# Altium PCB PCB.PcbDoc (part 2 of 2)
Units mil, origin at the board's own origin, x right, y up, seen from the top; angles counter-clockwise.
Board outline 2180 x 2315 mil, 4 copper layers (Top Layer, Layer 1, power, Bottom Layer), stack 23.756 mil thick; 49 components, 44 nets, 312 pads, 189 vias.
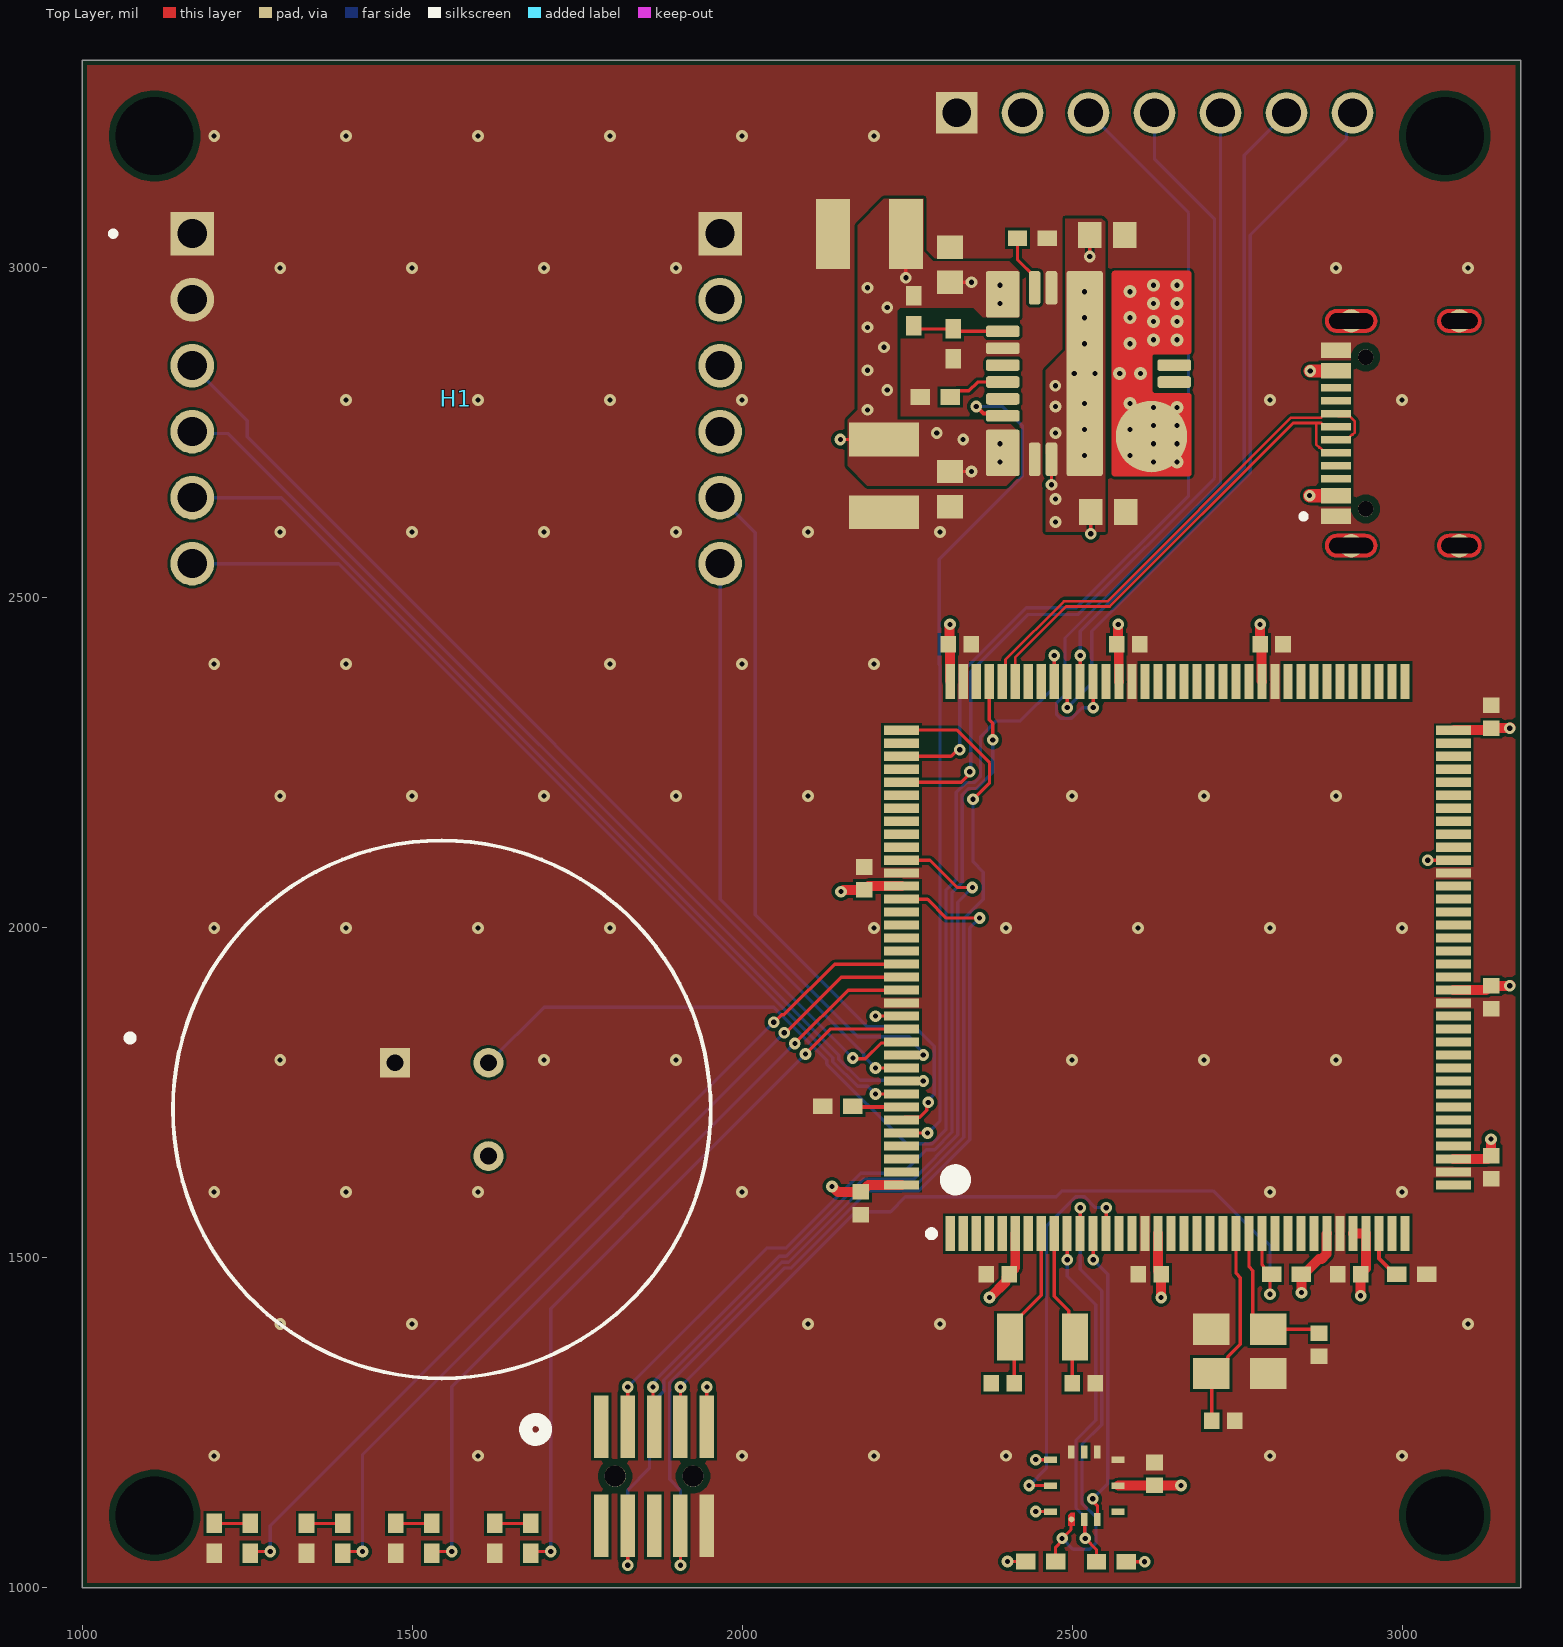
[diagram p0: Top Layer view]

## Via types
v1: diameter 17.72, hole 7.87, Top Layer to Bottom Layer, tented both sides, 153 vias
v2: diameter 19.68, hole 7.87, Top Layer to Bottom Layer, 36 vias

## Nets (pads, with @x,y where several pads share a name; then routed paths per layer and width w, separated by ;. In a path a pad name is that pad's centre, name@x,y a point inside that pad or via, vN(x,y) a via of type N, cw(c..) or ccw(c..) an arc to the next point about the centre after c; other vN are vias at no path point) (continued)
PGOOD: (continued)
  Bottom Layer w5: v1(2281.12,1689.25) 2300,1708.13 2300,2397.71 2298.64,2399.07 2298.64,2558.64 2425,2685 2425,2760 2395,2790 v1(2355,2790)
PIR_INT: MD1.2 U1.100 | length 1680.7
  Top Layer w5: U1.100 v1(2472.99,2412.74)
  Bottom Layer w5: MD1.2 1700,1880 2048.13,1880 2128.54,1799.59 2128.54,1793.73 2249.38,1672.89 2287.9,1672.89 2309,1693.99 2309,2057.13 2324.64,2072.78 2324.64,2205.5 2339.5,2220.36 2351.78,2220.36 2361.36,2229.94 2361.36,2289.49 2385.51,2313.64 2421.78,2313.64 2472.99,2364.86 v1(2472.99,2412.74)
RST: J2.4 R3.2 U1.25 | length 1280.8
  Top Layer w5: J2.4 v1(1906.65,1304.41) ; U1.25 2787.95,1489.41 2790.1,1487.26 2790.1,1484.31 2800,1474.41 v1(2800,1445)
  Bottom Layer w5: v1(1906.65,1304.41) 2172.24,1570 2225,1570 2247.48,1592.48 2476.1,1592.48 2485.1,1601.48 2713.72,1601.48 2789.5,1525.71 2792.43,1525.71 2800,1518.13 v1(2800,1445)
RX: J2.9 U1.122 | length 1423.2
  Top Layer w5: v1(1906.65,1034.2) J2.9 ; U1.122 2281.12,2043.58 2309.71,2015 v1(2360,2015)
  Bottom Layer w5: v1(1906.65,1034.2) 1906.65,1148.28 1890.29,1164.64 1890.29,1311.19 2063.7,1484.59 2074.1,1484.59 2191,1601.48 2267.4,1601.48 2345,1679.08 2345,2000 v1(2360,2015)
SWDCLK: J2.7 U1.109 | length 1720.8
  Top Layer w5: v1(1826.65,1034.2) J2.7 ; U1.109 2242.2,2300 2325,2300 2375,2250 2375,2220 v1(2350,2195)
  Bottom Layer w5: v1(1826.65,1034.2) 1826.65,1148.28 1859.69,1181.32 1859.69,1276.03 1881.29,1297.63 1881.29,1314.91 2059.97,1493.59 2070.37,1493.59 2187.27,1610.48 2263.67,1610.48 2336,1682.81 2336,2014.13 2365.36,2043.49 2365.36,2084.64 2350,2100 v1(2350,2195)
SWDIO: J2.2 U1.105 | length 1429.4
  Top Layer w5: J2.2 v1(1826.65,1304.41) ; U1.105 2374.57,2315.43 2380,2310 v1(2380,2285)
  Bottom Layer w5: v1(1826.65,1304.41) 2037.24,1515 2066.33,1515 2179.81,1628.48 2243.49,1628.48 2278.9,1663.89 2291.63,1663.89 2318,1690.27 2318,2053.41 2333.64,2069.05 2333.64,2201.78 2343.22,2211.36 2355.5,2211.36 2380,2235.85 v1(2380,2285)
TX: J2.3 U1.119 | length 1193.5
  Top Layer w5: v1(1864.93,1304.41) 1864.93,1246.02 J2.3 ; U1.119 2284.78,2102.64 2326.15,2061.27 v1(2349,2061.27)
  Bottom Layer w5: v1(1864.93,1304.41) 1867.37,1306.84 1867.37,1313.72 2056.24,1502.59 2066.65,1502.59 2183.54,1619.48 2259.95,1619.48 2327,1686.54 2327,2039.27 v1(2349,2061.27)
USB_D_N: J1.A7 J1.B7 U1.103 | length 741.6
  Top Layer w4: U1.103@2415,2372.25 U1.103 2413.94,2410.11 2490.83,2487 2557,2487 2835.21,2765.21 2870,2765.21 ; J1.B7 2883.46,2720 2875.68,2727.78 2875.07,2727.78 2870,2732.85 2870,2765.21 ; J1.A7 2883.46,2759.37 2877.62,2765.21 2870,2765.21
USB_D_P: J1.A6 J1.B6 U1.104 | length 773.5
  Top Layer w4: U1.104 2399.14,2378.2 2399.14,2406.63 2487.51,2495 2553.69,2495 2831.9,2773.21 2877.62,2773.21 2883.46,2779.06 J1.B6 2903.91,2775.15 2921.05,2775.15 2928.44,2767.76 2928.44,2750.98 2924.93,2747.46 2924.31,2747.46 2916.54,2739.69 J1.A6
VCC: C2.1 C4.2 C5.2 C6.2 C7.2 C8.2 C9.2 C14.2 C15.2 C16.2 C17.2 C18.2 C19.2 C20.2 C21.2 C22.2 H1.8 H1.9 J2.5 MD1.3 MD2.1 MD2.8 P1.2 R3.1 R5.2 R8.1 R9.1 U1.6 U1.17 U1.30 U1.32 U1.33 U1.39 U1.52 U1.62 U1.72 U1.84 U1.95 U1.108 U1.121 U1.131 U1.144 U2.5 U2.10 U2.12 | length 1687.7
  Top Layer w5: J2.5 v1(1946.65,1304.41) ; v1(2148.99,2740.12) C17.2 ; v1(2202.26,1866.42) U1.131 ; v1(2248.24,2985.34) C15.2 ; C18.2 v1(2347.54,2691.57) ; C16.2 v1(2347.54,2978.43) ; v1(2402.1,1040) R8.1 ; v1(2444.93,1115.63) U2.12 ; v1(2444.93,1194.37) U2.10 ; R9.1 v1(2609.98,1039.74) ; v1(3038.88,2102.64) U1.62
  Top Layer w15: v1(2136.28,1608.08) 2137.01,1608.08 2145.09,1600 2180.79,1600 2191.3,1610.51 U1.144 ; v1(2150,2055) 2150.74,2055 2153.41,2057.68 C5.2 ; C5.2@2191.38,2063.27 U1.121 ; v1(2315,2460) 2314.48,2459.48 2314.48,2431.8 C7.2 2314.9,2427.78 2314.9,2373.92 U1.108 ; v1(2375,1440) 2375.67,1440 2400.33,1464.66 2400.33,1470.69 C2.1 2404.65,1475.79 2413.94,1485.08 U1.6 ; U2.5 2570.18,1155.18 2624.82,1155.18 C21.2 2625.18,1155.18 2664.82,1155.18 v1(2665,1155) ; v1(2570,2460) 2569.48,2459.48 2569.48,2431.8 C22.2 2570.81,2426.87 2570.81,2373.92 U1.95 ; U1.17 2630.47,1480.32 2635,1475.79 C20.2 v1(2635,1440) ; v1(2785,2460) C14.2 2787.34,2427.66 2787.34,2373.92 U1.84 ; v1(2847.64,1447.36) R3.1 2850.59,1475 2874.21,1498.62 2878.35,1498.62 2885.77,1506.04 2885.77,1536.08 U1.30 ; U1.32 U1.33 2945.43,1483.9 2937.32,1475.79 C19.2 v1(2937.32,1442.68) ; U1.39 3129.45,1649.88 3134.21,1654.65 C6.2 v1(3135,1680) ; U1.52 C9.2@3127.68,1905.79 ; U1.72 3078.92,2300.1 3132.42,2300.1 C8.2 v1(3163.27,2302.68) v1@3164.63,2304.04 ; C9.2 v1(3163.27,1912.32) v1@3164.63,1913.68
  other v1: 2335,2740 2295,2750 2190,2785 2220,2815 2190,2845 2215,2880 2190,2910 2220,2940 2190,2970
  other v2: 2390.75,2706.14 2390.75,2733.7 2390.75,2946.3 2390.75,2973.86
pads on no net: C12.2 H1.10 J1. J1.A5 J1.A8 J1.B5 J1.B8 J2.1 J2.6 J2.8 J2.11 J2.12 MD2.4 MD2.6 MD2.16 MD2.17 U1.1 U1.2 U1.3 U1.4 U1.5 U1.7 U1.14 U1.15 U1.18 U1.19 U1.20 U1.21 U1.22 U1.26 U1.27 U1.28 U1.29 U1.35 U1.36 U1.37 U1.40 U1.41 U1.42 U1.43 U1.44 U1.45 U1.46 U1.47 U1.48 U1.49 U1.50 U1.53 U1.54 U1.55 U1.56 U1.57 U1.58 U1.59 U1.60 U1.63 U1.64 U1.65 U1.66 U1.67 U1.68 U1.69 U1.70 U1.71 U1.73 U1.74 U1.75 U1.76 U1.77 U1.78 U1.79 U1.80 U1.81 U1.82 U1.85 U1.86 U1.87 U1.88 U1.89 U1.90 U1.91 U1.92 U1.93 U1.96 U1.101 U1.102 U1.106 U1.110 U1.112 U1.114 U1.115 U1.116 U1.117 U1.118 U1.123 U1.124 U1.125 U1.126 U1.141 U1.142 U1.143 U2.4 U2.8

## Polygon pours and split planes (outlines as drawn)
GND on Top Layer "GND_L01_P005" (solid, pour order 5): 3185,3320 3185,985 990,985 990,3320
VCC on Top Layer "VCC_L01_P000" (solid, pour order 0): 2400,2770 2235,2770 2235,2935 2240,2940 2350,2940 2365,2925 2420,2925 2420,2995 2405,3010 2290,3010 2275,3025 2275,3105 2215,3105 2175,3065 2175,2785 2160,2770 2160,2700 2190,2670 2400,2670 2420,2690 2420,2750
+5 on Top Layer "+5_L01_P002" (solid, pour order 2): 2460,2600 2460,2845 2490,2875 2490,3075 2545,3075 2550,3070 2550,2600
VCC on power "VCC_L03_P004" (solid, pour order 4): 1000,3305 1005,3300 3175,3300 3175,1005 3160,990 995,990 995,3300
+5 on power "+5_L03_P003" (solid, pour order 3): 2460,2595 2465,2600 2925,2600 2925,2970 2880,3015 2490,3015 2490,2880 2460,2850 2460,2840
GND on Layer 1 "GND_L02_P007" (solid, pour order 7): 3175,3325 3175,990 980,990 980,3325
GND on Bottom Layer "GND_L04_P008" (solid, pour order 8): 1005,3325 3180,3325 3180,990 3175,995 1000,995 1000,3320